# Altium PCB PMSM_showV0.3.PcbDoc
Units mil, origin at the board's own origin, x right, y up, seen from the top; angles counter-clockwise.
Board outline 2696.85 x 2795.28 mil, 2 copper layers (Top Layer, Bottom Layer); 28 components, 29 nets, 107 pads, 42 vias.
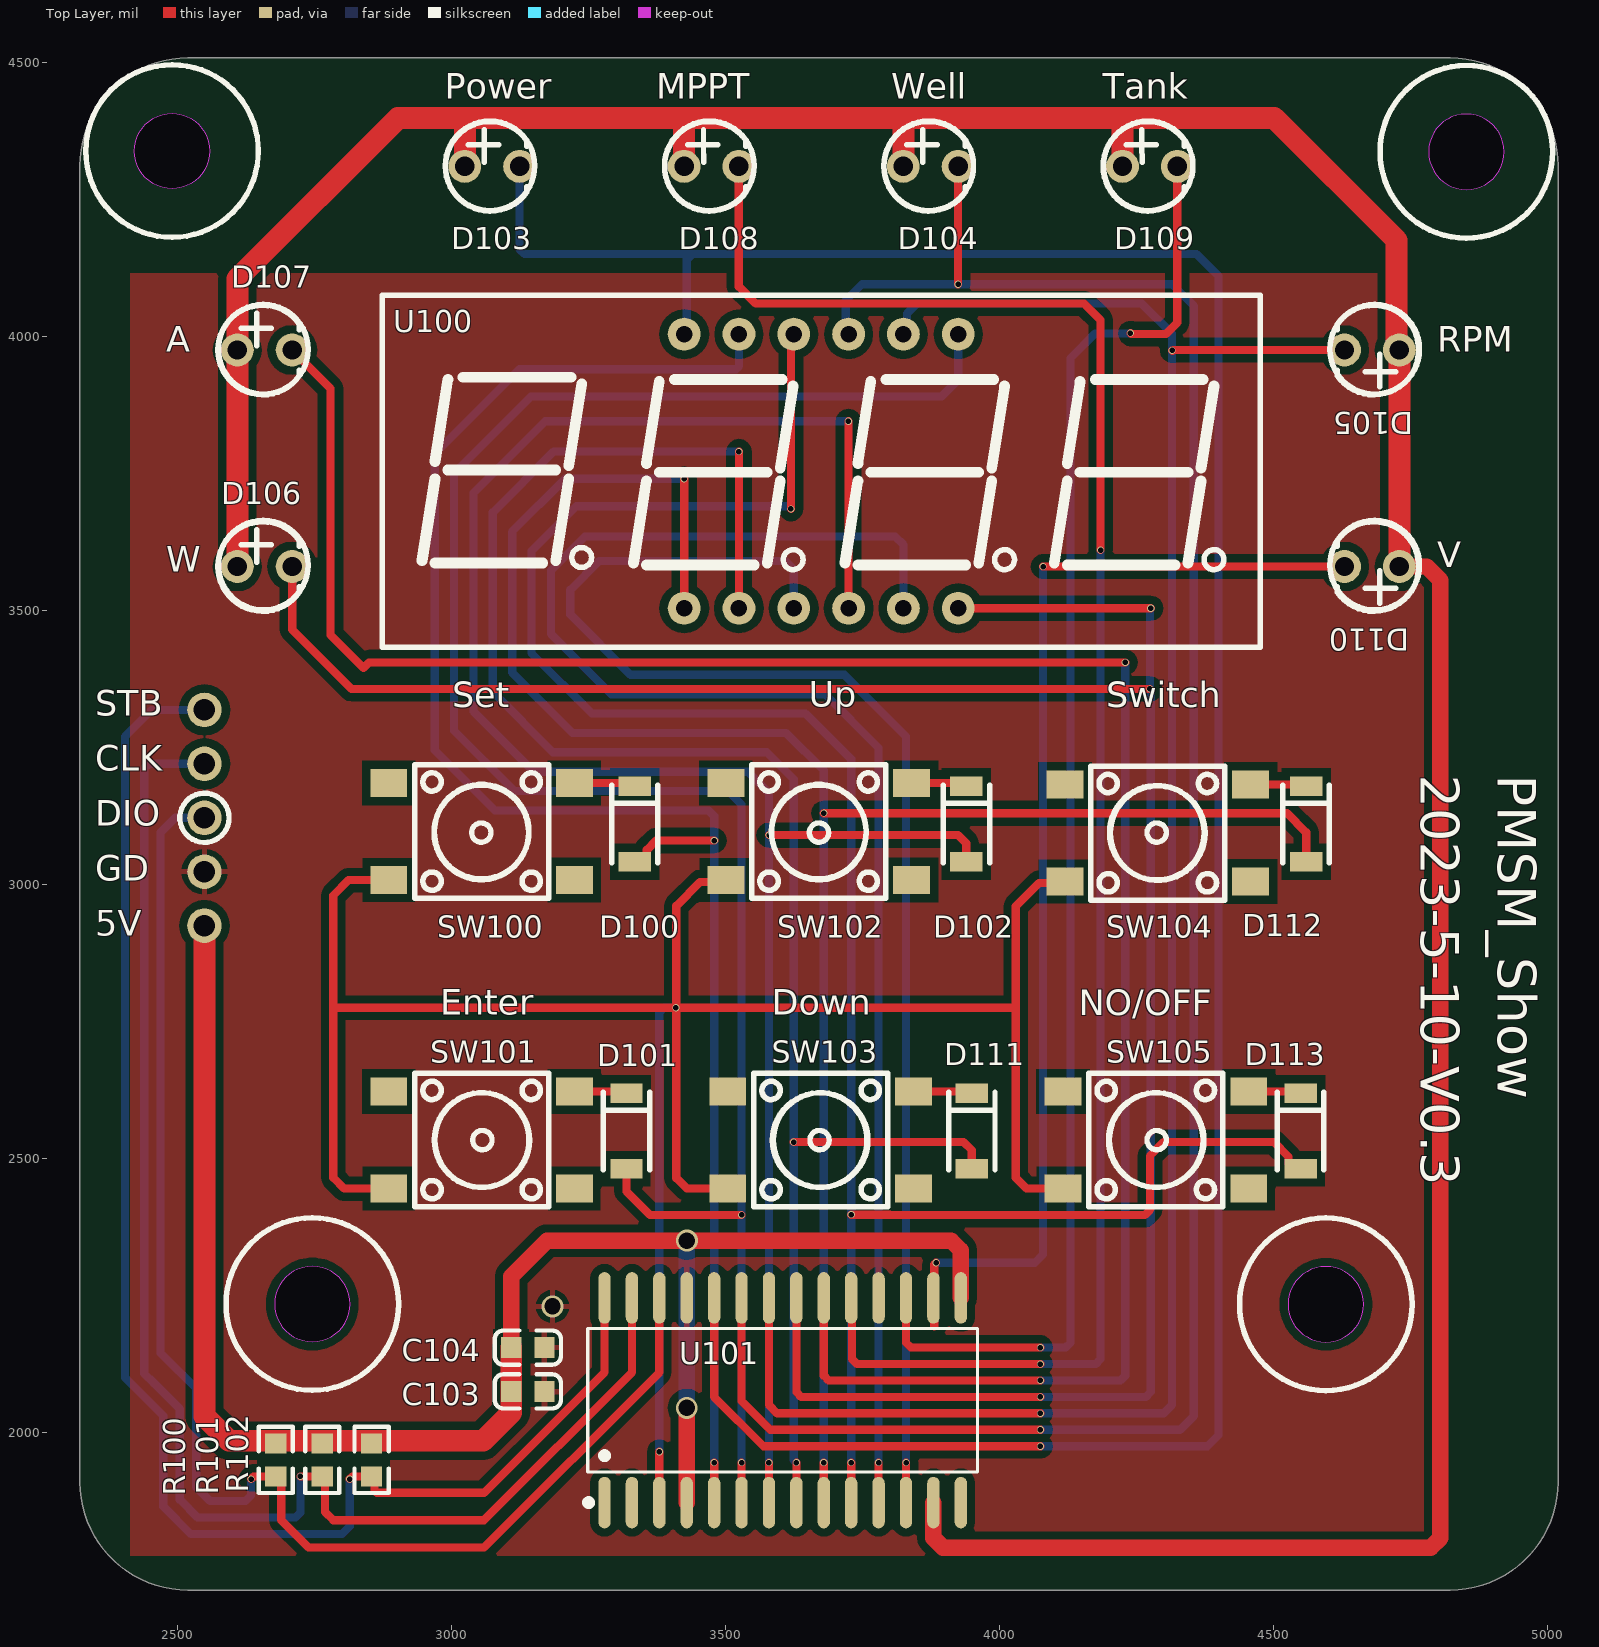
[diagram p0: Top Layer view]
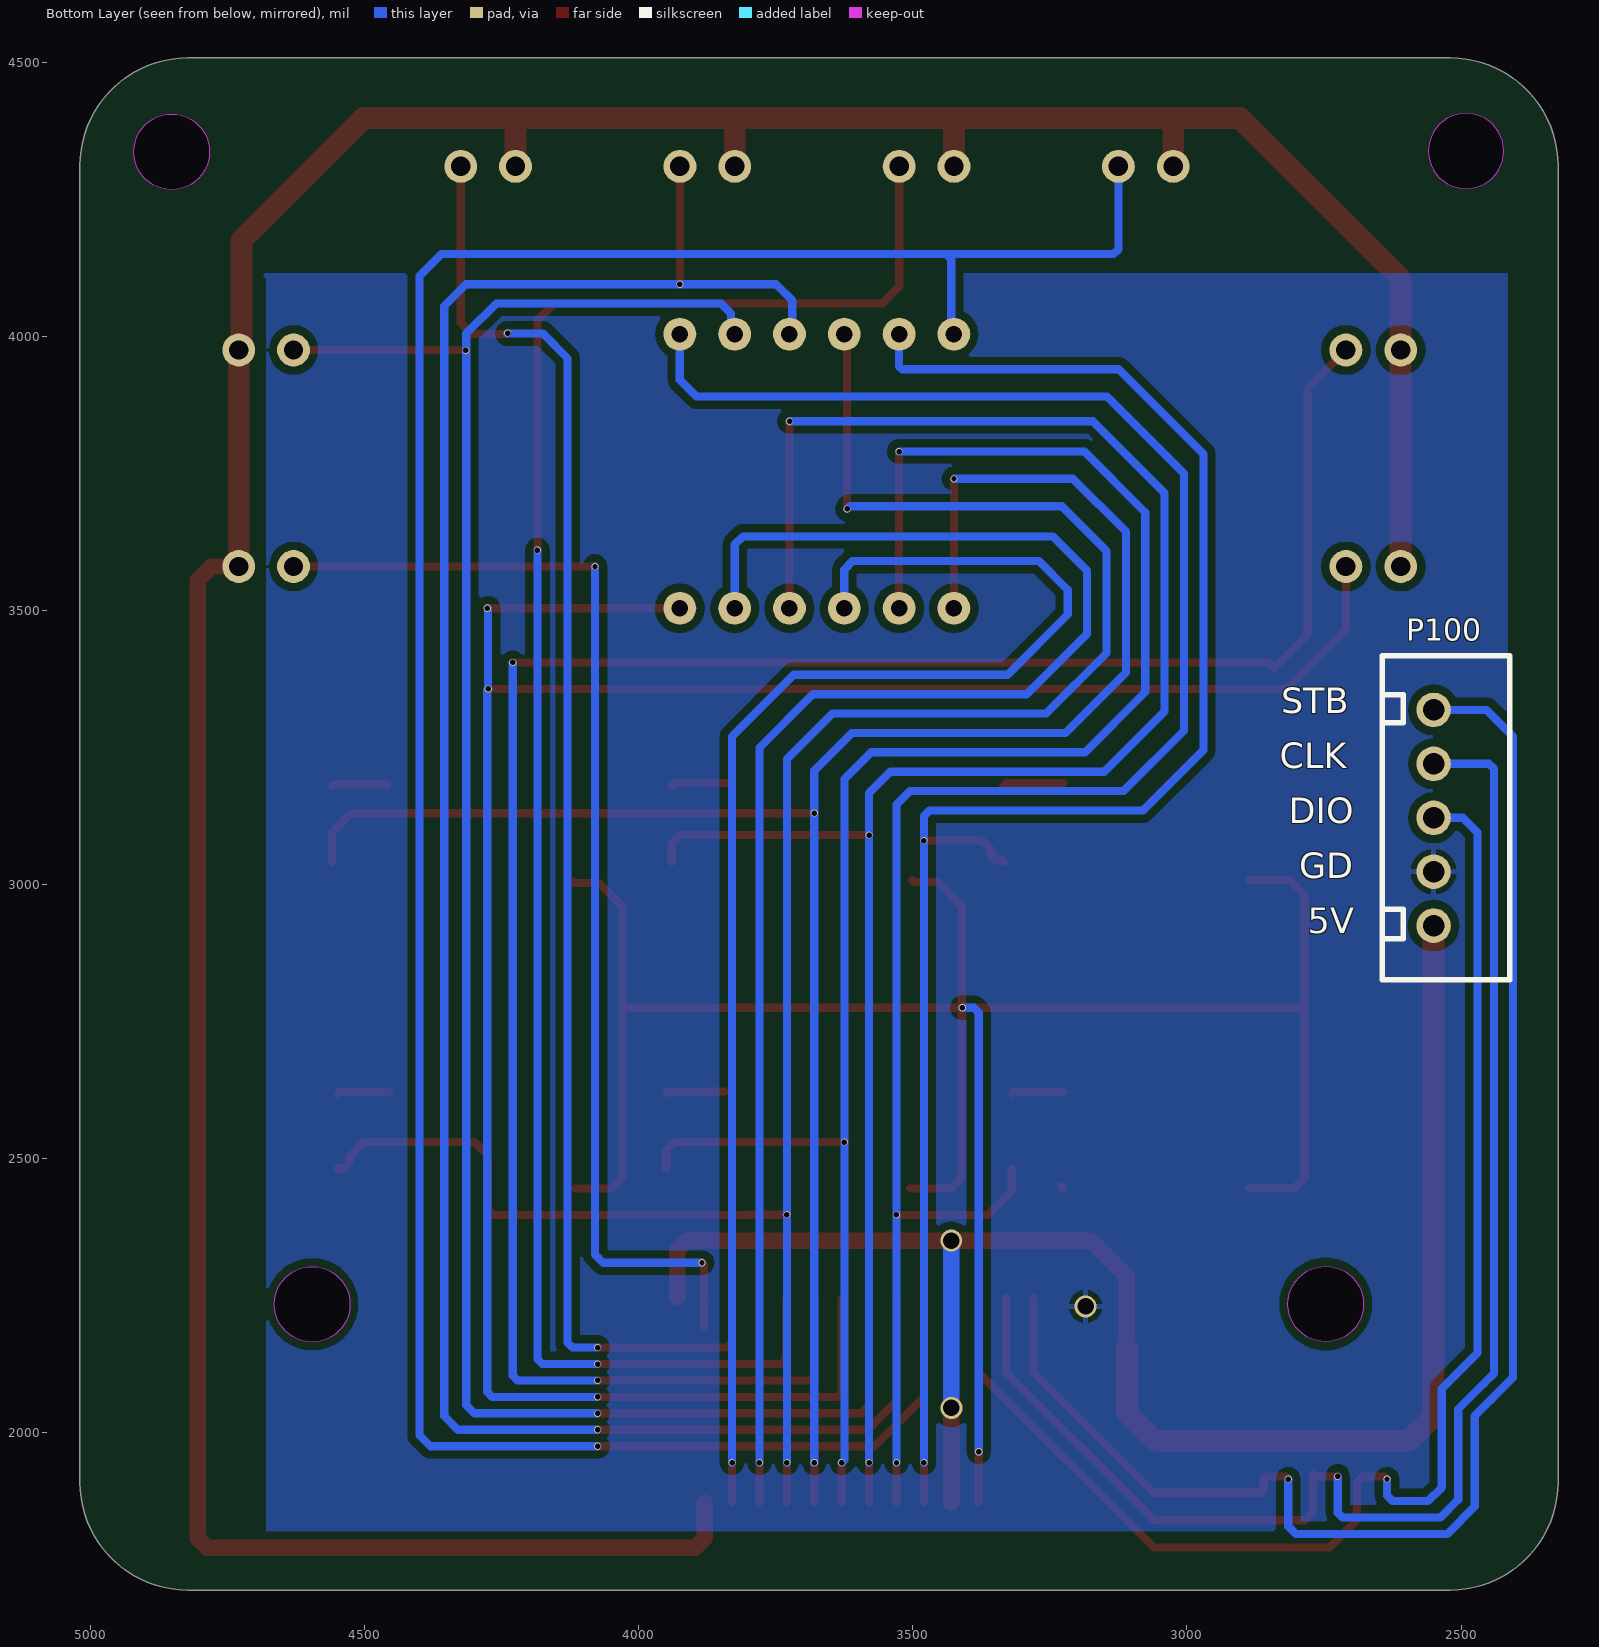
[diagram p1: Bottom Layer view, seen from below]

## Layer stack, top to bottom
Top Solder: solder mask 0.4, Solder Resist, Dk 3.5
Top Layer: signal copper 1.4
Dielectric 1: dielectric 12.6, FR-4, Dk 4.8
Bottom Layer: signal copper 1.4
Bottom Solder: solder mask 0.4, Solder Resist, Dk 3.5

## Board outline
2322.83,1909.45 ccw(c2519.69,1909.45) 2519.68,1712.6 4822.83,1712.6 ccw(c4822.83,1909.45) 5019.69,1909.45 5019.69,4311.02 ccw(c4822.83,4311.02) 4822.83,4507.87 2519.68,4507.87 ccw(c2519.68,4311.02) 2322.83,4311.02
cut-out: 4527.1,2234 ccw(c4596,2234) 4596,2165.1 ccw(c4596,2234) 4664.9,2234 ccw(c4596,2234) 4596,2302.9 ccw(c4596,2234)
cut-out: 2677.92,2234.47 ccw(c2746.81,2234.47) 2746.81,2165.57 ccw(c2746.81,2234.47) 2815.71,2234.47 ccw(c2746.81,2234.47) 2746.81,2303.37 ccw(c2746.81,2234.47)
cut-out: 4783.46,4336.61 ccw(c4852.36,4336.61) 4852.36,4267.72 ccw(c4852.36,4336.61) 4921.26,4336.61 ccw(c4852.36,4336.61) 4852.36,4405.51 ccw(c4852.36,4336.61)
cut-out: 2490.82,4269.17 cw(c2490.82,4338.06) 2421.93,4338.06 cw(c2490.82,4338.06) 2490.82,4406.96 cw(c2490.82,4338.06) 2559.72,4338.06 cw(c2490.82,4338.06)

## Design rules (kind name [scope] priority, off if disabled: settings)
Clearance [All] p1: gap=15 ignorepadtopadclearanceinfootprint=FALSE
ComponentClearance [All] p1: gap=0 collisioncheckmode=3 verticalgap=0 showdistances=FALSE
HoleToHoleClearance [All] p1: gap=0 allowstackedmicrovias=TRUE
MinimumSolderMaskSliver [All] p1: minsoldermaskwidth=0
PolygonConnect [All] p1: connectstyle=Relief reliefconductorwidth=10 reliefentries=4 polygonreliefangle="90 Angle" airgapwidth=10
RoutingVias [All] p1: holewidth=10 width=15 viastyle="Through Hole" minholewidth=10 minwidth=13 maxholewidth=50 maxwidth=50
SilkToSilkClearance [All] p1: silktosilkclearance=0
SilkToSolderMaskClearance [IsPad] p1: minsilkscreentomaskgap=0 clearancetoexposedcopper=TRUE
SolderMaskExpansion [All] p1: expansion=4 istentingtop=FALSE
Width [All] p1: maxlimit=50 minlimit=10 preferedwidth=10
25 further rules are at their usual default settings.

## Components (designator, comment, footprint, x,y, rotation, side; value= is the part's Value field where it differs from the comment)
C103 "10uF (106) 10% 10V" 0603_C 3140,2075 r180 top
C104 "100nF (104) 10% 50V" 0603_C 3140,2155 r180 top
D100 "LL4148 LL-34 1206" LL-34 3335,3110 r270 top
D101 "LL4148 LL-34 1206" LL-34 3320,2550 r270 top
D102 "LL4148 LL-34 1206" LL-34 3940,3110 r270 top
D103 "绿灯 0603" LED插件--3mm 3025,4310 r0 top
D104 "绿灯 0603" LED插件--3mm 3825,4310 r0 top
D105 "绿灯 0603" LED插件--3mm 4730,3975 r180 top
D106 "绿灯 0603" LED插件--3mm 2610,3580 r0 top
D107 "绿灯 0603" LED插件--3mm 2610,3975 r0 top
D108 "绿灯 0603" LED插件--3mm 3425,4310 r0 top
D109 "绿灯 0603" LED插件--3mm 4225,4310 r0 top
D110 "绿灯 0603" LED插件--3mm 4730,3580 r180 top
D111 "LL4148 LL-34 1206" LL-34 3950,2550 r270 top
D112 "LL4148 LL-34 1206" LL-34 4560,3110 r270 top
D113 "LL4148 LL-34 1206" LL-34 4550,2550 r270 top
P100 "Header 5" XH2.54-5P 2550,2924.72 r90 bottom
R100 "10KΩ (1002) ±1%" 0603_R 2680,1950 r270 top
R101 "10KΩ (1002) ±1%" 0603_R 2765,1950 r270 top
R102 "10KΩ (1002) ±1%" 0603_R 2855,1950 r270 top
SW100 "立贴6*6*8" SW 3225,3007.83 r180 top
SW101 "立贴6*6*8" SW 2886.41,2622.17 r0 top
SW102 "立贴6*6*8" SW 3840,3007.83 r180 top
SW103 "立贴6*6*8" SW 3505,2622.17 r0 top
SW104 "立贴6*6*8" SW 4120,3182.17 r0 top
SW105 "立贴6*6*8" SW 4116.41,2622.17 r0 top
U100 "FJ4401AH" Digital_0.4 4279.02,3788.07 r0 top locked
U101 "TM1638" TM1638 3699.09,2043.92 r0 top

## Footprints (in the part's own frame and the unit in brackets; to place one, negate y for a bottom-side part, rotate by r counter-clockwise, add the part's x,y. Pads: shape width x height; smd on the part's side, far side on the other; paste and mask are expansions set on the pad)
0603_C [mm]
  rect 0.93x0.98 smd: 1(-0.77,0) 2(0.77,0)
  silkscreen extent -1.53,-0.79 1.54,0.79, body extent -0.8,-0.4 0.8,0.4, height 0.3
0603_R [mm]
  rect 0.93x0.98 smd: 1(-0.77,0) 2(0.77,0)
  silkscreen extent -1.53,-0.79 1.54,0.79, body extent -0.85,-0.4 0.85,0.4, height 0.56
Digital_0.4 [mil]
  round 60 hole 30: 1(-853.82,-284.13) 2(-753.82,-284.13) 3(-653.82,-284.13) 4(-553.82,-284.13) 5(-453.82,-284.13) 6(-353.82,-284.13) 7(-353.82,215.87) 8(-453.82,215.87) 9(-553.82,215.87) 10(-653.82,215.87) 11(-753.82,215.87) 12(-853.82,215.87)
  silkscreen extent -1405,-355 197,287
LED插件--3mm [mil]
  round 60 hole 35.43: A(0,0) K(100,0)
  silkscreen extent -35,-82 113,82
LL-34 [mm]
  rect 0.9x1.5 smd: 1(1.75,0) 2(-1.75,0)
  silkscreen extent -1.8,-1.08 1.8,1.08
SW [mm] "立贴6*6*8"
  rect 1.7x1.3 smd paste+0 mask+0.051: 1(0,0) 2(8.6,0) 3(0,-4.5) 4(8.6,-4.5)
  silkscreen extent 1.2,-5.35 7.4,0.85
TM1638 [mm]
  oval 0.574x2.388 smd paste+0 mask+0.051: 1(-10.647,-4.363) 2(-9.377,-4.363) 3(-8.107,-4.363) 4(-6.837,-4.363) 5(-5.567,-4.363) 6(-4.297,-4.363) 7(-3.027,-4.363) 8(-1.757,-4.363) 9(-0.487,-4.363) 10(0.783,-4.363) 11(2.053,-4.363) 12(3.323,-4.363) 13(4.593,-4.363) 14(5.863,-4.363) 15(5.863,5.125) 16(4.593,5.125) 17(3.323,5.125) 18(2.053,5.125) 19(0.783,5.125) 20(-0.487,5.125) 21(-1.757,5.125) 22(-3.027,5.125) 23(-4.297,5.125) 24(-5.567,5.125) 25(-6.837,5.125) 26(-8.107,5.125) 27(-9.377,5.125) 28(-10.647,5.125)
  silkscreen extent -11.54,-4.51 6.63,3.7
XH2.54-5P [mm]
  round 1.6 hole 1 paste+0 mask+0.05: 1(0,0) 2(2.5,0) 3(5,0) 4(7.5,0) 5(10,0)
  silkscreen extent -2.5,-3.53 12.5,2.38

## Part data
C103: library part "0603 10uF (106) 10% 10V", "贴片电容", Package=0603, SuppliersPartNumber=C19702, ComponentLink1Description=供应商链接, ComponentLink1URL=http://www.szlcsc.com/product/details_20411.html, Supplier=LC
C104: library part "0603 100nF (104) 10% 50V", "贴片电容", Package=0603, SuppliersPartNumber=C14663, ComponentLink1Description=供应商链接, ComponentLink1URL=http://www.szlcsc.com/product/details_15331.html, Supplier=LC
D100 D101 D102 D111 D112 D113: library part "LL-34 LL4148 LL-34 1206", "开关二极管", Package=LL-34, SuppliersPartNumber=C9808, ComponentLink1Description=供应商链接, ComponentLink1URL=http://www.szlcsc.com/product/details_10338.html, Supplier=LC
D103 D104 D105 D106 D107 D108 D109 D110: library part "0603 绿灯", "发光二极管", Package=0603, SuppliersPartNumber=C72043, ComponentLink1Description=供应商链接, ComponentLink1URL=http://www.szlcsc.com/product/details_73152.html, Supplier=LC
P100: "Header, 5-Pin", LatestRevisionDate=17-Jul-2002, LatestRevisionNote="Re-released for DXP Platform.", Publisher="Altium Limited"
R100 R101 R102: library part "0603 10KΩ (1002) 1%", "贴片电阻", Package=0603, SuppliersPartNumber=C25804, ComponentLink1Description=供应商链接, ComponentLink1URL=http://www.szlcsc.com/product/details_26547.html, Supplier=LC
SW100 SW101 SW102 SW103 SW104 SW105: library part SW
U100: library part Digital_0.4

## Via types
v1: diameter 13, hole 10, Top Layer to Bottom Layer, 39 vias
v2: diameter 40, hole 30, Top Layer to Bottom Layer, 3 vias

## Nets (pads, with @x,y where several pads share a name; then routed paths per layer and width w, separated by ;. In a path a pad name is that pad's centre, name@x,y a point inside that pad or via, vN(x,y) a via of type N, cw(c..) or ccw(c..) an arc to the next point about the centre after c; other vN are vias at no path point)
5VDD: C103.2 C104.2 P100.1 R100.1 R101.1 R102.1 U101.4 U101.15 | length 3162
  Top Layer w30: C104.2 3109.68,2284.68 3175,2350 v2(3430,2350) 3912.35,2350 3929.92,2332.43 U101.15 ; U101.4 v2(3429.92,2044.92)
  Top Layer w40: P100.1 2550,2030 2595,1985 3058.64,1985 3109.68,2036.05 C103.2 C104.2
  Bottom Layer w30: v2(3429.92,2044.92) 3430,2045 v2(3430,2350)
CLK: P100.4 R101.2 U101.27 | length 2701.5
  Top Layer w15: v1(2725,1920) 2725.32,1919.68 R101.2 ; R101.2@2770,1925 2770,1855 2785,1840 3060,1840 3329.92,2109.92 U101.27
  Bottom Layer w15: P100.4 2448.79,3220 2440,3211.21 2440,2107.57 2457.57,2090 2505,2042.57 2505,1877.43 2537.43,1845 2716.21,1845 2725,1853.79 v1(2725,1920)
DGND: C103.1 C104.1 P100.2 U101.18 U101.25
  other v2: 3185,2230
DIO: P100.3 R100.2 U101.26 | length 2567.1
  Top Layer w15: v1(2635,1915) 2639.68,1919.68 R100.2 2690,1909.68 2690,1840 2740,1790 3060,1790 3379.92,2109.92 U101.26
  Bottom Layer w15: P100.3 2496.57,3121.57 2470,3095 2470,2145 2535,2080 2535,1900 2560,1875 2625,1875 2635,1885 v1(2635,1915)
GR1: D103.K U100.12 U101.24 | length 4859.9
  Top Layer w15: U101.24 3479.92,2065.08 3570,1975 v1(4075.22,1975)
  Bottom Layer w15: D103.K 3125,4158.79 3133.79,4150 3440,4150 ; U100.12 3430,4008.74 3430,4140 3440,4150 ; v1(4075.22,1975) 4380,1975 4400,1995 4400,4110 4360,4150 3480,4150 3440,4150
GR2: D104.K U100.9 U101.23 | length 4012.6
  Top Layer w15: U101.23 3529.92,2057.51 3582.43,2005 v1(4075.22,2005) ; v1(3925,4095) D104.K
  Bottom Layer w15: U100.9 3720,4009.13 3720,4065 3750,4095 v1(3925,4095) 4315,4095 4355,4055 4355,2030 4330,2005 v1(4075.22,2005)
GR3: D105.K U100.8 U101.22 | length 3767.9
  Top Layer w15: U101.22 3579.92,2049.93 3594.85,2035 v1(4075.22,2035) ; v1(4315.43,3974.28) 4316.07,3973.64 4317.43,3975 D105.K
  Bottom Layer w15: U100.8 3831.69,4010.43 3831.69,4041.69 3850,4060 4260,4060 4315,4005 4315,3974.71 v1(4315.43,3974.28) ; v1(4075.22,2035) 4300,2035 4315,2050 v1@4315,3974.28
GR4: D106.K U100.6 U101.21 | length 4332.6
  Top Layer w15: D106.K 2710,3465 2818.26,3356.74 v1(4274.84,3356.74) ; U101.21 3629.92,2073.79 3638.71,2065 v1(4075.22,2065) ; U100.6 v1(4276.49,3503.94)
  Bottom Layer w15: v1(4075.22,2065) 4267.7,2065 4276.49,2073.79 4276.49,3355.09 v1(4274.84,3356.74) ; v1@4275,3356.74 v1@4275,3503.94
GR5: D107.K U101.20 | length 4027.4
  Top Layer w15: D107.K 2780,3905 2780,3455 2840,3395 2850,3405 v1(4230,3405) ; U101.20 3679.92,2103.79 3688.71,2095 v1(4075.22,2095)
  Bottom Layer w15: v1(4075.22,2095) 4221.21,2095 4230,2103.79 v1@4230,3403.89
GR6: D108.K U101.19 | length 3374.1
  Top Layer w15: D108.K 3525,4090.61 3555.61,4060 4155,4060 4185,4030 v1(4185,3610) ; U101.19 3731.37,2244.24 3731.37,2133.79 3740.16,2125 v1(4075.22,2125)
  Bottom Layer w15: v1(4075.22,2125) 4176.21,2125 4185,2133.79 v1(4185,3610)
GR7: D109.K U101.17 | length 2695
  Top Layer w15: U101.17 3829.92,2163.79 3838.71,2155 v1(4075.22,2155) ; v1(4239.29,4005.71) 4240.72,4004.28 4304.28,4004.28 4325,4025 D109.K
  Bottom Layer w15: v1(4075.22,2155) 4121.21,2155 4130,2163.79 4130,3960 4175,4005 4240,4005 v1(4239.29,4005.71)
GR8: D110.K U101.16 | length 2125.4
  Top Layer w15: 3881.37,2193.63 3881.37,2244.24 U101.16 3881.37,2247.14 3881.37,2306.37 v1(3884.78,2309.78) ; v1(4080,3580) D110.K
  Bottom Layer w15: v1(3884.78,2309.78) 4065,2309.78 4080,2324.78 v1(4080,3580)
K3: SW100.2 SW101.3 SW102.2 SW103.3 SW104.3 SW105.3 U101.3 | length 4317.5
  Top Layer w15: SW101.3 2805,2445 2785,2465 2785,2775 ; SW100.2 2812.83,3007.83 2785,2980 2785,2775 ; U101.3 v1(3379.92,1964.92) ; SW102.2 3497.81,3004.23 3454.23,3004.23 3410.93,2960.93 v1@3410.93,2775 ; SW103.3 3430,2445 3410.93,2464.07 v1@3410.93,2775 ; SW105.3 4050,2445 4030,2465 4030,2775 ; SW104.3 4117.82,3002.82 4072.82,3002.82 4030,2960 4030,2775 ; 2785,2775 v1(3410,2775) v1@3410.93,2775 ; v1@3410.93,2775 4030,2775
  Bottom Layer w15: v1(3379.92,1964.92) 3379.92,2766.21 3388.71,2775 v1(3410,2775)
NetD100_2: D100.2 SW100.3 | length 112.5
  Top Layer w15: SW100.3 3328.9,3185 D100.2
NetD101_2: D101.2 SW101.2 | length 96.4
  Top Layer w15: SW101.2 3316.73,2622.17 D101.2
NetD102_2: D102.2 SW102.3 | length 102.5
  Top Layer w15: SW102.3 3933.9,3185 D102.2
NetD111_2: D111.2 SW103.2 | length 107.8
  Top Layer w15: SW103.2 3946.73,2622.17 D111.2
NetD112_2: D112.2 SW104.2 | length 102.8
  Top Layer w15: SW104.2 4556.73,3182.17 D112.2
NetD113_2: D113.2 SW105.2 | length 96.4
  Top Layer w15: SW105.2 4546.73,2622.17 D113.2
SEG1: D100.1 U100.11 U101.5 | length 3200.8
  Top Layer w15: D100.1 3340,3046.1 3351.81,3046.1 3357.03,3051.32 3357.03,3063.13 3373.9,3080 v1(3480,3080) ; U101.5 v1(3479.92,1945)
  Bottom Layer w15: v1(3479.92,1945) 3479.92,3125.08 3470,3135 3080,3135 2970,3245 2970,3784.97 3125.03,3940 3520,3940 3525.2,3945.2 U100.11
SEG2: D101.1 U100.7 U101.6 | length 3666.4
  Top Layer w15: D101.1 3320,2440 3363.09,2396.91 v1(3530,2396.91) ; U101.6 v1(3529.92,1945)
  Bottom Layer w15: v1(3529.92,1945) v1@3529.92,2396.91 ; v1(3530,2396.91) 3529.92,2396.99 3529.92,3145.79 3505.36,3170.36 3115.36,3170.36 3005.36,3280.36 3005.36,3749.62 3145.74,3890 3895,3890 3925.2,3920.2 U100.7
SEG3: D102.1 U100.4 U101.7 | length 3773.6
  Top Layer w15: U101.7 v1(3579.92,1945) ; v1(3580,3090) 3925,3090 3940,3075 D102.1 ; v1(3725,3845) 3725,3504.13 U100.4
  Bottom Layer w15: v1(3579.92,1945) 3579.92,3166.5 3540.71,3205.71 3150.71,3205.71 3040.71,3315.71 3040.71,3714.26 3171.45,3845 v1(3725,3845)
SEG4: D111.1 U100.2 U101.8 | length 3410.8
  Top Layer w15: U100.2 v1(3525.2,3789.8) ; v1(3625,2530) 3935,2530 3950,2515 D111.1 ; U101.8 v1(3629.92,1945)
  Bottom Layer w15: v1(3525.2,3789.8) 3525,3790 3187.16,3790 3076.07,3678.91 3076.07,3351.07 3186.07,3241.07 3576.07,3241.07 3625,3192.13 v1(3625,2530) 3625,1949.92 v1(3629.92,1945)
SEG5: D112.1 U100.1 U101.9 | length 3773.4
  Top Layer w15: v1(3425,3740) 3425.2,3739.8 U100.1 ; U101.9 v1(3679.92,1945) ; v1(3680,3130) 4525,3130 4560,3095 D112.1
  Bottom Layer w15: v1(3425,3740) 3207.87,3740 3111.42,3643.55 3111.42,3386.42 3221.42,3276.42 3611.42,3276.42 3679.92,3207.92 v1(3679.92,1945)
SEG6: D113.1 U100.10 U101.10 | length 3996.7
  Top Layer w15: v1(3620,3685) 3620,3998.74 U100.10 ; U101.10 v1(3729.92,1945) ; v1(3730,2397.5) 3800.22,2397.5 3800.81,2396.91 4265.62,2396.91 4275,2406.29 4275,2505 4300,2530 4501.1,2530 4527.97,2503.13 4527.97,2491.32 4538.19,2481.1 D113.1
  Bottom Layer w15: v1(3620,3685) 3615,3690 3228.58,3690 3146.78,3608.2 3146.78,3421.78 3256.78,3311.78 3646.78,3311.78 3729.92,3228.63 3729.92,2397.58 v1(3730,2397.5) ; v1(3729.92,1945) v1@3729.92,2397.5
SEG7: U100.5 U101.11 | length 2967.7
  Top Layer w15: U101.11 v1(3779.92,1945)
  Bottom Layer w15: v1(3779.92,1945) 3779.92,3249.34 3682.13,3347.13 3292.13,3347.13 3182.13,3457.13 3182.13,3572.84 3244.29,3635 3810,3635 3825.2,3619.8 U100.5
SEG8: U100.3 U101.12 | length 2654.2
  Top Layer w15: U101.12 3830,1872.23 v1(3830,1945)
  Bottom Layer w15: U100.3 3625.2,3574.8 3610,3590 3270,3590 3217.49,3537.49 3217.49,3492.49 3327.49,3382.49 3717.49,3382.49 3830,3269.97 v1(3830,1945)
SEG9: D103.A D104.A D105.A D106.A D107.A D108.A D109.A D110.A U101.13 | length 6647.4
  Top Layer w30: U101.13 3879.92,1807.57 3897.49,1790 4787.43,1790 4805,1807.57 4805,3555 4780,3580 D110.A
  Top Layer w40: D106.A D107.A 2610,4105 2903.43,4398.43 3015,4398.43 ; D103.A 3025,4388.43 3015,4398.43 ; D108.A 3425,4398.43 ; D104.A 3825,4393.43 3830,4398.43 ; D109.A 4225,4393.43 4220,4398.43 ; D105.A@4726.17,3976.17 4726.17,3992.97 4725,3994.14 4725,4175 4501.57,4398.43 4220,4398.43 ; D110.A D105.A ; 3015,4398.43 3425,4398.43 ; 3425,4398.43 3830,4398.43 ; 3830,4398.43 4220,4398.43
STB: P100.5 R102.2 U101.28 | length 2769.2
  Top Layer w15: v1(2815,1915) 2819.68,1919.68 R102.2 2860,1914.68 2860,1895 2865,1890 3060,1890 3279.92,2109.92 U101.28
  Bottom Layer w15: P100.5 2453.43,3318.43 2405,3270 2405,2100 2445,2060 2475,2030 2475,1865 2525,1815 2801.21,1815 2815,1828.79 v1(2815,1915)
pads on no net: SW100.1 SW100.4 SW101.1 SW101.4 SW102.1 SW102.4 SW103.1 SW103.4 SW104.1 SW104.4 SW105.1 SW105.4 U101.1 U101.2 U101.14
copper on no net: | length 7.1
  Top Layer w15: 3225,2445 3230,2450

## Polygon pours and split planes (outlines as drawn)
DGND on Top Layer "NONET_L01_P-001" (solid, remove dead copper, pour order 0): 4810,4115 4810,1780 4801.45,1775 2415,1775 2415,4115
DGND on Bottom Layer "NONET_L01_P-001" (solid, remove dead copper, pour order 1): 2415,4115 4688.44,4115 4689.23,4114.21 4680,4104.99 4680,1820 2415,1820

## Silkscreen, mask and mechanical layers (free items; w line width, h text height)
Top Overlay:
  circle w10: c4685.04,3582.68 r81.69
  circle w10: c4685.04,3976.38 r81.69
  circle w10: c2657.48,3582.68 r81.69
  circle w10: c2657.48,3976.38 r81.69
  circle w10: c4271.65,4311.02 r81.69
  circle w10: c3871.39,4311.02 r81.69
  circle w10: c3471.13,4311.02 r81.69
  circle w10: c3070.87,4311.02 r81.69
  circle w9.65: c3671.26,3094.49 r86.3
  circle w9.65: c2550,3121.57 r44.97
  circle w9.65: c4287.4,2533.46 r17.65
  circle w9.65: c3672.24,2533.46 r17.65
  circle w9.65: c3057.08,2533.46 r17.65
  circle w9.65: c4287.4,3094.49 r17.65
  circle w9.65: c3671.26,3094.49 r17.65
  circle w9.65: c3055.12,3094.49 r17.65
  circle w9.65: c4287.4,2533.46 r86.3
  circle w9.65: c3672.24,2533.46 r86.3
  circle w9.65: c3057.08,2533.46 r86.3
  circle w9.65: c4287.4,3094.49 r86.3
  circle w9.65: c3055.12,3094.49 r86.3
  circle w10: c4852.36,4336.61 r157.48
  circle w10: c2490.82,4338.06 r157.48
  circle w10: c4596,2234 r157.48
  circle w10: c2746.81,2234.47 r157.48
  text "Power" at 2988.19,4418.17 h80
  text "MPPT" at 3374.02,4418.14 h80
  text "Well" at 3803.15,4418.17 h80
  text "Tank" at 4188.98,4418.17 h80
  text "A" at 2480.26,3956.69 h80
  text "RPM" at 4799.21,3956.69 h80
  text "V" at 4799.21,3562.99 h80
  text "W" at 2480.32,3555.12 h80
  text "Up" at 3652.4,3308.7 h80
  text "Set" at 3002.4,3307.73 h80
  text "Switch" at 4195,3307.73 h80
  text "STB" at 2350.39,3292.19 h80
  text "2023-5-10-V0.3" at 4746.27,3200.07 h120 r270
  text "PMSM_Show" at 4886.38,3200 h120 r270
  text "CLK" at 2350.39,3191.79 h80
  text "DIO" at 2350.39,3091.4 h80
  text "GD" at 2350.39,2991.01 h80
  text "5V" at 2350.39,2890.61 h80
  text "Enter" at 2980,2746.81 h80
  text "Down" at 3585,2746.81 h80
  text "NO/OFF" at 4145,2745.85 h80
Bottom Overlay:
  text "STB" at 2827.56,3297.19 h80
  text "CLK" at 2830.89,3196.79 h80
  text "DIO" at 2813.87,3096.4 h80
  text "GD" at 2795.15,2996.01 h80
  text "5V" at 2779.38,2895.61 h80
Mechanical 1:
  circle w10: c4852.36,4336.61 r68.9
  circle w10: c2490.82,4338.06 r68.9
  circle w10: c4596,2234 r68.9
  circle w10: c2746.81,2234.47 r68.9
  lines w10: 2322.83,1909.45 ccw(c2519.69,1909.45) 2519.69,1712.6 ; 2322.83,4311.02 cw(c2519.68,4311.02) 2519.68,4507.87 ; 4822.83,1712.6 ccw(c4822.83,1909.45) 5019.68,1909.45 ; 4822.83,4507.87 cw(c4822.83,4311.02) 5019.68,4311.02
Mechanical 13:
  lines w10: 2322.83,1909.45 2322.83,4311.02 ; 2519.68,1712.6 4822.83,1712.6 ; 2519.68,4507.87 4822.83,4507.87 ; 5019.69,1909.45 5019.69,4311.02